# Altium PCB LM2576_DC-DC Converter.PcbDoc
Units mm, origin at the board's own origin, x right, y up, seen from the top; angles counter-clockwise.
Board outline 72.39 x 27.94 mm, 2 copper layers (Top Layer, Bottom Layer); 9 components, 6 nets, 23 pads, 0 vias.
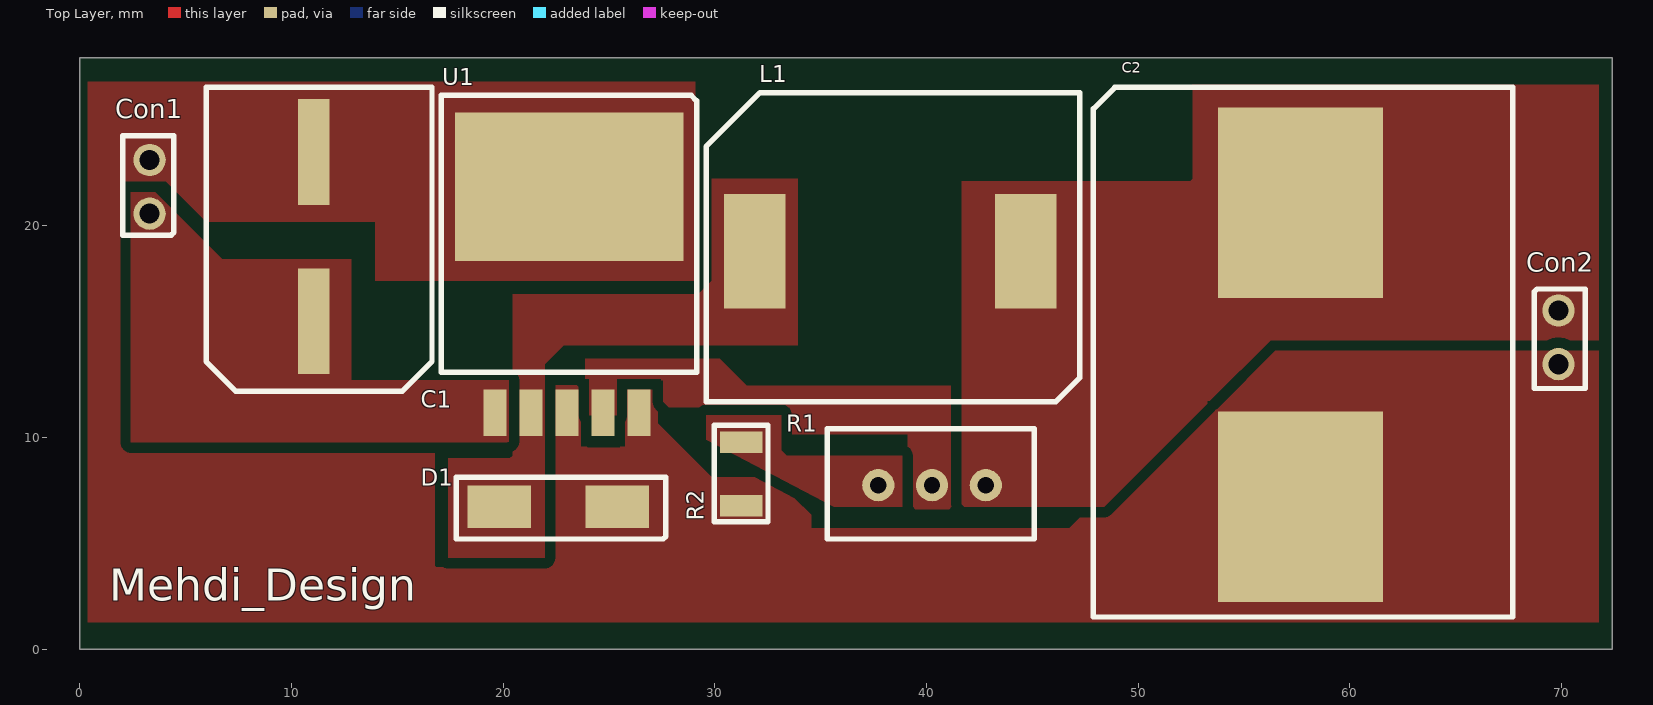
[diagram p0: Top Layer view]
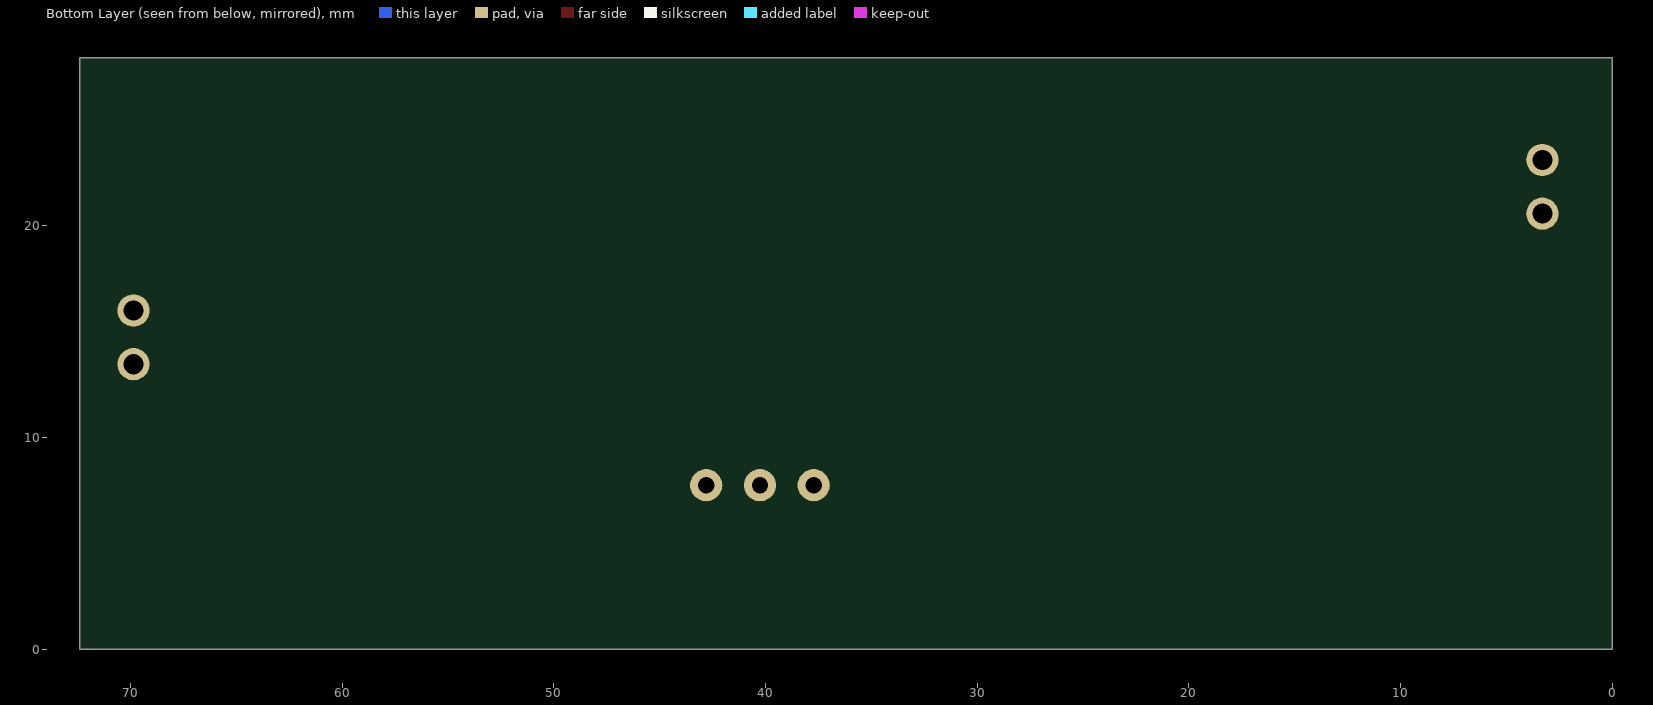
[diagram p1: Bottom Layer view, seen from below]
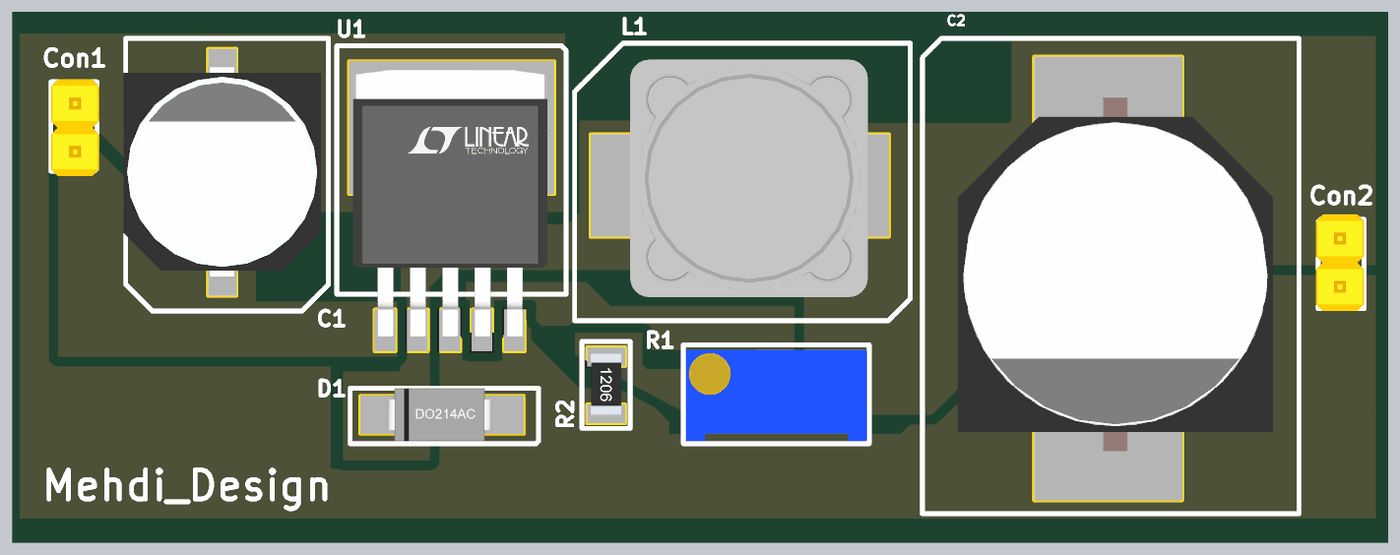
[diagram p2: 3D render of the assembled board from above, using the file's embedded part models]

## Layer stack, top to bottom
Top Solder: solder mask 0.0102, Solder Resist, Dk 3.5
Top Layer: signal copper 0.0356
Dielectric 1: dielectric 0.32, FR-4, Dk 4.8
Bottom Layer: signal copper 0.0356
Bottom Solder: solder mask 0.0102, Solder Resist, Dk 3.5

## Board outline
0,0 72.39,0 72.39,27.94 0,27.94

## Design rules (kind name [scope] priority, off if disabled: settings)
Clearance "polygons around" [IsRegion] p1: gap=0.5 ignorepadtopadclearanceinfootprint=FALSE
Clearance [All] p2: gap=0.2 ignorepadtopadclearanceinfootprint=FALSE
ComponentClearance [All] p1: gap=0.2 collisioncheckmode=3 verticalgap=0.2 showdistances=FALSE
HoleSize [All] p1: absolutevalues=TRUE maxlimit=10 minlimit=0.2 maxpercent=80.000 minpercent=20.000
HoleToHoleClearance [All] p1: gap=0.3 allowstackedmicrovias=TRUE
MinimumSolderMaskSliver [All] p1: minsoldermaskwidth=0.1
PolygonConnect [All] p1: connectstyle=Direct reliefconductorwidth=0.254 reliefentries=4 polygonreliefangle="90 Angle" airgapwidth=0.254
RoutingVias [All] p1: holewidth=0.711 width=1.27 viastyle="Through Hole" minholewidth=0.711 minwidth=1.27 maxholewidth=0.711 maxwidth=1.27
SilkToSilkClearance [All] p1: silktosilkclearance=0.1
SilkToSolderMaskClearance [IsPad] p1: minsilkscreentomaskgap=0.1 clearancetoexposedcopper=TRUE
SolderMaskExpansion [All] p1: expansion=0.1 istentingtop=FALSE
Width [All] p1: maxlimit=0.3 minlimit=0.2 preferedwidth=0.2
24 further rules are at their usual default settings.

## Components (designator, comment, footprint, x,y, rotation, side; value= is the part's Value field where it differs from the comment)
C1 "200uF" "220UF CAPACITOR" 11.049,15.494 r180 top
C2 "1000uF" "1000UF CAP" 57.658,21.082 r0 top
Con1 "2pinconnector" 2PIN 3.302,20.574 r180 top
Con2 "2pinconnector" 2PIN 69.85,16.002 r0 top
D1 "1N5822" 1N5822 19.812,6.731 r0 top
L1 "150uH" "150UH INDUCTOR" 31.877,18.796 r0 top
R1 "10K" "10K POT" 40.259,7.747 r270 top
R2 "1K" "1K 1206 RES" 31.242,6.779 r90 top
U1 "LM2576" LM2576-TO63-5 19.614,11.174 r90 top

## Footprints (in the part's own frame and the unit in brackets; to place one, negate y for a bottom-side part, rotate by r counter-clockwise, add the part's x,y. Pads: shape width x height; smd on the part's side, far side on the other; paste and mask are expansions set on the pad)
"1K 1206 RES" [mm]
  rect 1x2 smd: 1(0,0) 2(3,0)
  silkscreen extent -0.76,-1.27 3.81,1.27, body extent -0.04,-0.8 3.16,0.8, height 0.56
1N5822 [mm]
  rect 3x2 smd: 1(0,0) 2(5.588,0)
  silkscreen extent -2.03,-1.52 7.87,1.4, body extent -0.08,-1.4 5.41,1.4, height 2.3
2PIN [mil]
  round 60 hole 37.4: 1(0,0) 2(0,-100)
  silkscreen extent -45,-145 50,40, body extent -50,-150 50,50, height 374
"10K POT" [mil]
  round 60 hole 30: 1(0,100) 2(0,0) 3(0,-100)
  silkscreen extent -105,-195 100,190, body extent -94,-190 94,185, height 455
"150UH INDUCTOR" [mm]
  rect 2.9x5.4 smd: 1(0,0) 2(12.8,0)
  silkscreen extent -2.29,-7.11 15.37,7.49, body extent 0.64,-5.87 13.14,6.63, height 7.51
"220UF CAPACITOR" [mm]
  rect 1.5x5 smd: 1(0,0) 2(0,-8.001)
  silkscreen extent -5.59,-11.05 5.08,3.3, body extent -5.19,-9.53 5.21,1.47, height 10.41
"1000UF CAP" [mm]
  rect 7.8x9 smd: 1(0,0) 2(0,-14.351)
  silkscreen extent -9.78,-19.56 10.03,5.46, body extent -7.92,-16.26 8.68,2.34, height 17.51
LM2576-TO63-5 [mm] "D2-PAK, 6-Pads, Body 7,42x8,51mm (max), IPC Medium Density"
  rect 2.2x1.1 smd: 1(0,0) 2(0,-1.7) 3(0,-3.4) 4(0,-5.1) 5(0,-6.8)
  rect 7x10.8 smd: 3(10.67,-3.5)
  silkscreen extent 1.91,-9.52 14.99,2.54, body extent -0.33,-8.54 13.72,1.68, height 4.38

## Part data
C1: library part "Electrolytic Cap 220uF", "Cap Aluminum 220uF 50V 20% (10 X 10mm) SMD 220mA 1000 hr 105°C T/R", Capacitance=220uF, Case/Package=SMD/SMT, Dielectric Material=Aluminium, Leakage Current=3uA, Manufacturer=Nichicon, Manufacturer Part Number=UWT1H221MNL1GS, Max Operating Temperature=105°C, Min Operating Temperature=-55°C, Package Quantity=500, Ripple Current=220mA, Supplier Part Number 1=493-2228-1-ND, Tolerance=20%, Voltage=50V, Category="Aluminum Electrolytic Capacitors", ComponentLink1Description=https://datasheet.ciiva.com/11686/e-wt-11686311.pdf?src-supplier=Avnet, ComponentLink1URL=https://datasheet.ciiva.com/11686/e-wt-11686311.pdf?src-supplier=Avnet, ComponentLink2Description=https://datasheet.ciiva.com/97/e-wt-97496.pdf?src-supplier=Digi-Key, ComponentLink2URL=https://datasheet.ciiva.com/97/e-wt-97496.pdf?src-supplier=Digi-Key, ComponentLink3Description=https://datasheet.ciiva.com/97/e-wt-97498.pdf?src-supplier=Digi-Key, ComponentLink3URL=https://datasheet.ciiva.com/97/e-wt-97498.pdf?src-supplier=Digi-Key, ComponentLink4Description=https://datasheet.ciiva.com/16502/e-wt-16502942.pdf?src-supplier=Future+Electronics, ComponentLink4URL=https://datasheet.ciiva.com/16502/e-wt-16502942.pdf?src-supplier=Future+Electronics, ComponentLink5Description=https://datasheet.ciiva.com/7781/e-wt-7781462.pdf?src-supplier=Element14, ComponentLink5URL=https://datasheet.ciiva.com/7781/e-wt-7781462.pdf?src-supplier=Element14, ComponentLink6Description=https://datasheet.ciiva.com/97/e-wt-97497.pdf?src-supplier=Digi-Key, ComponentLink6URL=https://datasheet.ciiva.com/97/e-wt-97497.pdf?src-supplier=Digi-Key, ComponentLink7Description=https://datasheet.ciiva.com/28458/1910938-28458474.pdf?src-supplier=Element14, ComponentLink7URL=https://datasheet.ciiva.com/28458/1910938-28458474.pdf?src-supplier=Element14, ComponentLink8Description=https://datasheet.ciiva.com/17526/e-wt-17526124.pdf?src-supplier=Avnet+Europe, ComponentLink8URL=https://datasheet.ciiva.com/17526/e-wt-17526124.pdf?src-supplier=Avnet+Europe, Diameter=10mm, Dissipation Factor=0.14%, Height=10mm, Height - Seated (Max)=0.394inch, Lead Free="Lead Free", Lead Pitch=4.5mm, Length=10mm, Life (Hours)=1000Hour, Mount="Surface Mount", Number of Pins=2, Packaging="Tape and Reel", Pricing 1="1=0,68000, 10=0,47800, 50=0,36160, 100=0,31490 (USD)", Radiation Hardening=No, REACH SVHC="No SVHC", Ripple Current (AC)=220mA, RoHS=Yes, Stock 1=3000, Supplier 1=Digi-Key, Termination=SMD/SMT, Voltage Rating=50V, Voltage Rating (DC)=50V
C2: library part "Electrolytic Cap_1000uF", "CAP ALUM 1000UF 20% 50V SMD", Capacitance=1mF, Case/Package=Radial, Leakage Current=500uA, Manufacturer="Vishay BCcomponents", Manufacturer Part Number=MAL214699111E3, Max Operating Temperature=125°C, Min Operating Temperature=-55°C, Package Quantity=1, Ripple Current=1.5A, Supplier Part Number 1=4444PHCT-ND, Tolerance=20%, Voltage=50V, Category="Aluminum Electrolytic Capacitors", ComponentLink1Description=https://datasheet.ciiva.com/100/146cti-100170.pdf?src-supplier=Digi-Key, ComponentLink1URL=https://datasheet.ciiva.com/100/146cti-100170.pdf?src-supplier=Digi-Key, ComponentLink2Description=https://datasheet.ciiva.com/100/146cti-100171.pdf?src-supplier=Digi-Key, ComponentLink2URL=https://datasheet.ciiva.com/100/146cti-100171.pdf?src-supplier=Digi-Key, ComponentLink3Description=https://datasheet.ciiva.com/100/146cti-100172.pdf?src-supplier=Digi-Key, ComponentLink3URL=https://datasheet.ciiva.com/100/146cti-100172.pdf?src-supplier=Digi-Key, ComponentLink4Description=https://datasheet.ciiva.com/11782/0900766b81003e87-11782463.pdf?src-supplier=RSComponents, ComponentLink4URL=https://datasheet.ciiva.com/11782/0900766b81003e87-11782463.pdf?src-supplier=RSComponents, ComponentLink5Description=https://datasheet.ciiva.com/11697/146cti-11697686.pdf?src-supplier=Avnet, ComponentLink5URL=https://datasheet.ciiva.com/11697/146cti-11697686.pdf?src-supplier=Avnet, ComponentLink6Description=https://datasheet.ciiva.com/5360/146cti-247382-5360174.pdf?src-supplier=Mouser, ComponentLink6URL=https://datasheet.ciiva.com/5360/146cti-247382-5360174.pdf?src-supplier=Mouser, Diameter=16mm, Height=21mm, Height - Seated (Max)=0.827inch, Impedance=52mR, Lead Diameter=1.3mm, Lead Pitch=6.5mm, Life (Hours)=6000Hour, Mount="Surface Mount,PCB", Packaging="Tape and Reel", Polarity=Polar, Pricing 1="1=3,56000, 10=3,44300, 50=3,08660 (USD)", Radiation Hardening=No, RoHS=Yes, Stock 1=4157, Supplier 1=Digi-Key, Termination=SMD/SMT, Voltage Rating=50V, Voltage Rating (DC)=50V, Width=16mm
Con1 Con2: "Conn Unshrouded Header HDR 2 POS 2.54mm Solder ST Thru-Hole KK® Bag", Contact Resistance=10mR, Current Rating=4A, Flammability Rating="UL94 V-0", Housing Color=White, Insulation Resistance=50GR, Manufacturer=Molex, Manufacturer Part Number=22-10-2021, Max Operating Temperature=75°C, Min Operating Temperature=0°C, Package Quantity=3000, Supplier Part Number 1=WM2722-ND, Voltage Rating=250V, Category="Headers and Wire Housings", ComponentLink1Description=https://datasheet.ciiva.com/10088/0022102021-pcb-headers-10088323.pdf?src-supplier=Avnet, ComponentLink1URL=https://datasheet.ciiva.com/10088/0022102021-pcb-headers-10088323.pdf?src-supplier=Avnet, ComponentLink2Description=https://datasheet.ciiva.com/5159/0022102021-pcb-headers-158487-5159068.pdf?src-supplier=Mouser, ComponentLink2URL=https://datasheet.ciiva.com/5159/0022102021-pcb-headers-158487-5159068.pdf?src-supplier=Mouser, ComponentLink3Description=https://datasheet.ciiva.com/16727/0022102021-pcb-headers-16727093.pdf?src-supplier=Avnet+Europe, ComponentLink3URL=https://datasheet.ciiva.com/16727/0022102021-pcb-headers-16727093.pdf?src-supplier=Avnet+Europe, ComponentLink4Description=https://datasheet.ciiva.com/30179/126490022102021-pcb-headers-30179367.pdf?src-supplier=Onlinecomponents.com, ComponentLink4URL=https://datasheet.ciiva.com/30179/126490022102021-pcb-headers-30179367.pdf?src-supplier=Onlinecomponents.com, ComponentLink5Description=https://datasheet.ciiva.com/49385/878868-49385685.pdf?src-supplier=Jameco, ComponentLink5URL=https://datasheet.ciiva.com/49385/878868-49385685.pdf?src-supplier=Jameco, ComponentLink6Description=https://datasheet.ciiva.com/1433/1862685-1433864.pdf?src-supplier=Element14, ComponentLink6URL=https://datasheet.ciiva.com/1433/1862685-1433864.pdf?src-supplier=Element14, ComponentLink7Description=https://datasheet.ciiva.com/15217/getdatasheetpartid-251334-15217596.pdf?src-supplier=Verical, ComponentLink7URL=https://datasheet.ciiva.com/15217/getdatasheetpartid-251334-15217596.pdf?src-supplier=Verical, Contact Material=Brass, Contact Plating=Gold, Gender=Male, Glow Wire Compliant=Non-compliant, Halogen Free="Low Halogen", Housing Material=Nylon, Lead Free="Lead Free", Mount="Through Hole", Number of Circuits=2, Number of Contacts=2, Number of Positions=2, Number of Rows=1, Orientation=Straight, Packaging=Bulk, Pitch=2.54mm, Pricing 1="1=0,40000, 10=0,38300, 100=0,26800, 500=0,22974, 1000=0,19145, 5000=0,16410, 10000=0,15316 (USD)", Radiation Hardening=No, REACH SVHC=Unknown, RoHS=Yes, Stock 1=6869, Supplier 1=Digi-Key, Termination=Solder, Voltage Rating (DC)=250V
D1: "DIODE SCHOTTKY 40V 3A DO214AC", Average Rectified Current=3A, Case/Package=SMA, Forward Voltage=500mV, Manufacturer=MCC, Manufacturer Part Number=SK34A-LTP, Max Forward Surge Current (Ifsm)=80A, Max Operating Temperature=125°C, Max Repetitive Reverse Voltage (Vrrm)=40V, Min Operating Temperature=-50°C, Package Quantity=1, Supplier Part Number 1=SK34A-LTPMSCT-ND, Category="Rectifier Diodes", ComponentLink1Description=https://datasheet.ciiva.com/15200/getdatasheetpartid-723745-15200572.pdf?src-supplier=Verical, ComponentLink1URL=https://datasheet.ciiva.com/15200/getdatasheetpartid-723745-15200572.pdf?src-supplier=Verical, ComponentLink2Description=https://datasheet.ciiva.com/917/sk32a-ltsk310a-lt28do-214ac29-917378.pdf?src-supplier=Digi-Key, ComponentLink2URL=https://datasheet.ciiva.com/917/sk32a-ltsk310a-lt28do-214ac29-917378.pdf?src-supplier=Digi-Key, ComponentLink3Description=https://datasheet.ciiva.com/917/sk32a-ltsk310a-lt28do-214ac29-917379.pdf?src-supplier=Digi-Key, ComponentLink3URL=https://datasheet.ciiva.com/917/sk32a-ltsk310a-lt28do-214ac29-917379.pdf?src-supplier=Digi-Key, ComponentLink4Description=https://datasheet.ciiva.com/917/sk32a-ltsk310a-lt28do-214ac29-917380.pdf?src-supplier=Digi-Key, ComponentLink4URL=https://datasheet.ciiva.com/917/sk32a-ltsk310a-lt28do-214ac29-917380.pdf?src-supplier=Digi-Key, Element Configuration=Single, Forward Current=3A, Max Reverse Voltage (DC)=40V, Mount="Surface Mount", Number of Pins=2, Packaging="Tape and Reel", Peak Non-Repetitive Surge Current=80A, Pricing 1="1=0,47000, 10=0,31900, 100=0,18850, 500=0,12760, 1000=0,09570 (USD)", Radiation Hardening=No, RoHS=Yes, Stock 1=124742, Supplier 1=Digi-Key, Weight=0.003739oz
L1: library part "150uH L", Manufacturer="Wurth Electronics", Manufacturer Part Number=7447706151, Pricing 1="1=1,75000, 10=1,63000, 50=1,49000, 100=1,36000 (USD)", RoHS=No, Stock 1=1000, Supplier 1=Digi-Key
R1: library part "Variable Resistor", "POT, TRIMMER, 10KOHM, 25TURN, PANEL; Product Range:AEC-Q200 3296W Series; Track Resistance:10kohm; No. of Turns:25Turns; Power Rating:500mW; Resistance Tolerance: 10%; Temperature Coefficient: 100ppm/ C ;RoHS Compliant: Yes", Manufacturer=Bourns, Manufacturer Part Number=3296W-1-103RLF, Max Operating Temperature=125°C, Max Power Dissipation=500mW, Min Operating Temperature=-55°C, Package Quantity=1, Resistance=10kR, Supplier Part Number 1=3296W-1-103RLFCT-ND, Temperature Coefficient=100ppm/°C, Tolerance=10%, Category="Variable Resistors and Potentiometers", ComponentLink1Description=https://datasheet.ciiva.com/16807/3296-16807592.pdf?src-supplier=Avnet+Europe, ComponentLink1URL=https://datasheet.ciiva.com/16807/3296-16807592.pdf?src-supplier=Avnet+Europe, ComponentLink2Description=https://datasheet.ciiva.com/8088/3296-8088775.pdf?src-supplier=Avnet, ComponentLink2URL=https://datasheet.ciiva.com/8088/3296-8088775.pdf?src-supplier=Avnet, ComponentLink3Description=https://datasheet.ciiva.com/15156/getdatasheetpartid-227249-15156874.pdf?src-supplier=Verical, ComponentLink3URL=https://datasheet.ciiva.com/15156/getdatasheetpartid-227249-15156874.pdf?src-supplier=Verical, ComponentLink4Description=https://datasheet.ciiva.com/6226/3296-6226765.pdf?src-supplier=Digi-Key, ComponentLink4URL=https://datasheet.ciiva.com/6226/3296-6226765.pdf?src-supplier=Digi-Key, ComponentLink5Description=https://datasheet.ciiva.com/6226/3296-6226767.pdf?src-supplier=Digi-Key, ComponentLink5URL=https://datasheet.ciiva.com/6226/3296-6226767.pdf?src-supplier=Digi-Key, Composition=Cermet, Contact Plating=Tin,Matte, Depth=4.83mm, Height=0.395inch, Length=9.53mm, Military Standard=Not, Mount="Through Hole,PCB", Number of Turns=25, Packaging="Tape and Reel", Power Rating=500mW, Pricing 1="1=3,97000, 10=3,47300, 25=3,10040, 50=2,91440, 100=2,85250, 250=2,72844, 500=2,23236 (USD)", Radiation Hardening=No, REACH SVHC="No SVHC", RoHS=Yes, Stock 1=3943, Supplier 1=Digi-Key, Taper=Linear, Termination=Pin, Weight=0.03oz, Width=0.19inch
R2: library part Resistor, "RES SMD 1K OHM 5% 1/4W 1206", Case Code (Imperial)=1206, Case Code (Metric)=3216, Manufacturer=Yageo, Manufacturer Part Number=RC1206JR-071KL, Max Operating Temperature=155°C, Max Power Dissipation=250mW, Min Operating Temperature=-55°C, Package Quantity=1, Resistance=1kR, Supplier Part Number 1=311-1.0KERCT-ND, Temperature Coefficient=100ppm/°C, Tolerance=5%, Voltage Rating=200V, Case/Package=1206, Category="Chip SMD Resistors", ComponentLink1Description=https://datasheet.ciiva.com/2458/pyu-r-int-thick-7-2458673.pdf?src-supplier=Digi-Key, ComponentLink1URL=https://datasheet.ciiva.com/2458/pyu-r-int-thick-7-2458673.pdf?src-supplier=Digi-Key, ComponentLink2Description=https://datasheet.ciiva.com/2458/pyu-r-int-thick-7-2458672.pdf?src-supplier=Digi-Key, ComponentLink2URL=https://datasheet.ciiva.com/2458/pyu-r-int-thick-7-2458672.pdf?src-supplier=Digi-Key, ComponentLink3Description=https://datasheet.ciiva.com/2458/pyu-r-int-thick-7-2458671.pdf?src-supplier=Digi-Key, ComponentLink3URL=https://datasheet.ciiva.com/2458/pyu-r-int-thick-7-2458671.pdf?src-supplier=Digi-Key, Composition="Thick Film", Depth=1.6mm, Height=0.026inch, Lead Free="Lead Free", Length=3.1mm, Military Standard=Not, Number of Terminations=2, Packaging="Tape and Reel", Power Rating=250mW, Pricing 1="1=0,10000, 10=0,05900, 100=0,02400, 1000=0,01079, 2500=0,00936 (USD)", REACH SVHC=Unknown, RoHS=Yes, Stock 1=1963755, Supplier 1=Digi-Key, Termination=SMD/SMT, Width=0.063inch
U1: "Conv DC-DC Single Inv/Step Down 4V to 60V 6-Pin(5+Tab) TO-263 T/R", Case/Package=TO-263-5, Manufacturer="TI National Semiconductor", Manufacturer Part Number=LM2576HVSX-ADJ/NOPB, Max Input Voltage=60V, Max Operating Temperature=125°C, Max Output Current=3A, Max Output Voltage=57V, Min Input Voltage=4V, Min Operating Temperature=-40°C, Min Output Voltage=1.23V, Package Quantity=500, Quiescent Current=5mA, Supplier Part Number 1=LM2576HVSX-ADJ/NOPBCT-ND, Switching Frequency=58kHz, Category="Voltage Regulators - Switching", ComponentLink1Description=https://datasheet.ciiva.com/34303/1992566-34303691.pdf?src-supplier=Jameco, ComponentLink1URL=https://datasheet.ciiva.com/34303/1992566-34303691.pdf?src-supplier=Jameco, ComponentLink2Description=https://datasheet.ciiva.com/41457/001013734-da-01-en-ic-reg-lm2576hvsx-adj-nopb-to-263-5-tid-41457610.pdf?src-supplier=Conrad, ComponentLink2URL=https://datasheet.ciiva.com/41457/001013734-da-01-en-ic-reg-lm2576hvsx-adj-nopb-to-263-5-tid-41457610.pdf?src-supplier=Conrad, ComponentLink3Description=https://datasheet.ciiva.com/6596/lm2576hv-6596698.pdf?src-supplier=Digi-Key, ComponentLink3URL=https://datasheet.ciiva.com/6596/lm2576hv-6596698.pdf?src-supplier=Digi-Key, ComponentLink4Description=https://datasheet.ciiva.com/6596/lm2576hv-6596700.pdf?src-supplier=Digi-Key, ComponentLink4URL=https://datasheet.ciiva.com/6596/lm2576hv-6596700.pdf?src-supplier=Digi-Key, ComponentLink5Description=https://datasheet.ciiva.com/6596/lm2576hv-6596701.pdf?src-supplier=Digi-Key, ComponentLink5URL=https://datasheet.ciiva.com/6596/lm2576hv-6596701.pdf?src-supplier=Digi-Key, Contact Plating=Tin, Efficiency=77%, Lead Free="Contains Lead", Mount="Surface Mount", Number of Outputs=1, Number of Pins=5, Operating Supply Voltage=60V, Output Current=3A, Output Type=Adjustable, Output Voltage=57V, Packaging="Tape and Reel", Pricing 1="1=6,10000, 10=5,47400, 25=5,17520, 100=4,25500, 250=3,81800 (USD)", Radiation Hardening=No, REACH SVHC="No SVHC", RoHS=Yes, Stock 1=2345, Supplier 1=Digi-Key, Synchronous Rectifier=No

## Nets (pads, with @x,y where several pads share a name; then routed paths per layer and width w, separated by ;. In a path a pad name is that pad's centre, name@x,y a point inside that pad or via, vN(x,y) a via of type N, cw(c..) or ccw(c..) an arc to the next point about the centre after c; other vN are vias at no path point)
GND: C1.2 C2.2 Con1.2 Con2.2 D1.2 R2.1 U1.3 U1.5
NetC1_1: C1.1 Con1.1 U1.1
NetC2_1: C2.1 Con2.1 L1.2 R1.1
NetCon2_1: R1.3 R2.2
NetD1_1: D1.1 L1.1 U1.2
NetR1_2: R1.2 U1.4

## Polygon pours and split planes (outlines as drawn)
NetC1_1 on Top Layer "NONET_L01_P-001" (solid, remove dead copper, pour order 2): 2.413,21.59 3.556,21.59 6.731,18.415 12.827,18.415 12.827,12.7 20.32,12.7 20.32,9.652 20.193,9.779 2.413,9.779
NetC2_1 on Top Layer "NETC2_1_L01_P012" (solid, remove dead copper, pour order 12): 71.755,14.605 56.261,14.605 48.387,6.731 41.783,6.731 41.656,6.858 41.656,22.098 52.451,22.098 52.578,22.225 52.578,26.67 71.755,26.67
NetCon2_1 on Top Layer "NETCON2_1_L01_P013" (solid, remove dead copper, pour order 13): 38.862,9.144 38.862,6.731 35.623,6.731 29.591,9.906 29.591,11.049 33.147,11.049 33.147,9.398 33.401,9.144
NetR1_2 on Top Layer "NETR1_2_L01_P014" (solid, remove dead copper, pour order 14): 41.402,6.604 39.37,6.604 39.116,6.858 39.116,10.16 33.528,10.16 33.528,11.43 27.813,11.43 27.559,11.684 27.559,12.7 25.527,12.7 25.527,11.049 24.003,11.049 23.876,11.176 23.876,13.716 30.226,13.716 31.496,12.446 41.402,12.446
GND on Top Layer "NONET_L01_P-001" (solid, remove dead copper, pour order 0): 2.286,26.797 29.083,26.797 29.083,17.399 13.97,17.399 13.97,20.193 5.969,20.193 4.064,22.098 2.286,22.098
GND on Top Layer "GND_L01_P019" (solid, remove dead copper, pour order 19): 71.755,14.605 55.626,14.605 46.736,5.715 34.544,5.715 34.544,6.35 32.766,8.128 29.845,8.128 27.305,10.668 27.305,12.446 25.654,12.446 25.527,12.319 25.527,9.525 24.003,9.525 23.736,9.792 23.736,12.464 22.227,12.464 22.183,12.508 22.183,3.869 16.832,3.869 16.764,3.937 16.764,9.398 2.413,9.398 2.032,9.779 2.032,22.098 5.207,22.098 5.207,26.797 0.381,26.797 0.381,1.27 71.755,1.27
NetD1_1 on Top Layer "NETD1_1_L01_P016" (solid, remove dead copper, pour order 16): 17.399,4.318 21.971,4.318 21.971,13.462 22.86,14.351 33.909,14.351 33.909,22.225 29.845,22.225 29.845,17.399 29.21,16.764 20.447,16.764 20.447,9.144 20.32,9.017 17.399,9.017
NetC2_1 on Top Overlay (solid): 77.851,9.906

## Silkscreen, mask and mechanical layers (free items; w line width, h text height)
Top Overlay:
  text "Mehdi_Design" at 1.397,2.286 h1.52
Board outline:
  lines w0.15: 0,0 0,27.94 ; 0,0 72.39,0 ; 0,0 72.39,0 ; 0,0 0,27.94 ; 0,27.94 72.39,27.94 ; 0,27.94 72.39,27.94 ; 72.39,0 72.39,27.94 ; 72.39,0 72.39,27.94
Mechanical drawing:
  lines w0.15: 0,0 0,27.94 ; 0,0 72.39,0 ; 0,0 72.39,0 ; 0,0 0,27.94 ; 0,27.94 72.39,27.94 ; 0,27.94 72.39,27.94 ; 72.39,0 72.39,27.94 ; 72.39,0 72.39,27.94
  text "Mechanical Drawing" at 25.146,35.941 h1.52
  text "Units : Mils" at -23.495,-10.541 h1.52
Mechanical 13:
  text "Assembly TOP of LM2576_DC-DC" at 14.986,31.369 h1.52

## Dimensions
0,27.94 to 0,0 on Mechanical drawing
0,0 to 72.39,0 on Mechanical drawing